# Altium PCB OSPLC2_2_CPU.PcbDoc
Units mm, origin at the board's own origin, x right, y up, seen from the top; angles counter-clockwise.
Board outline 110 x 42 mm, 2 copper layers (Top Layer, Bottom Layer); 72 components, 101 nets, 383 pads, 70 vias.
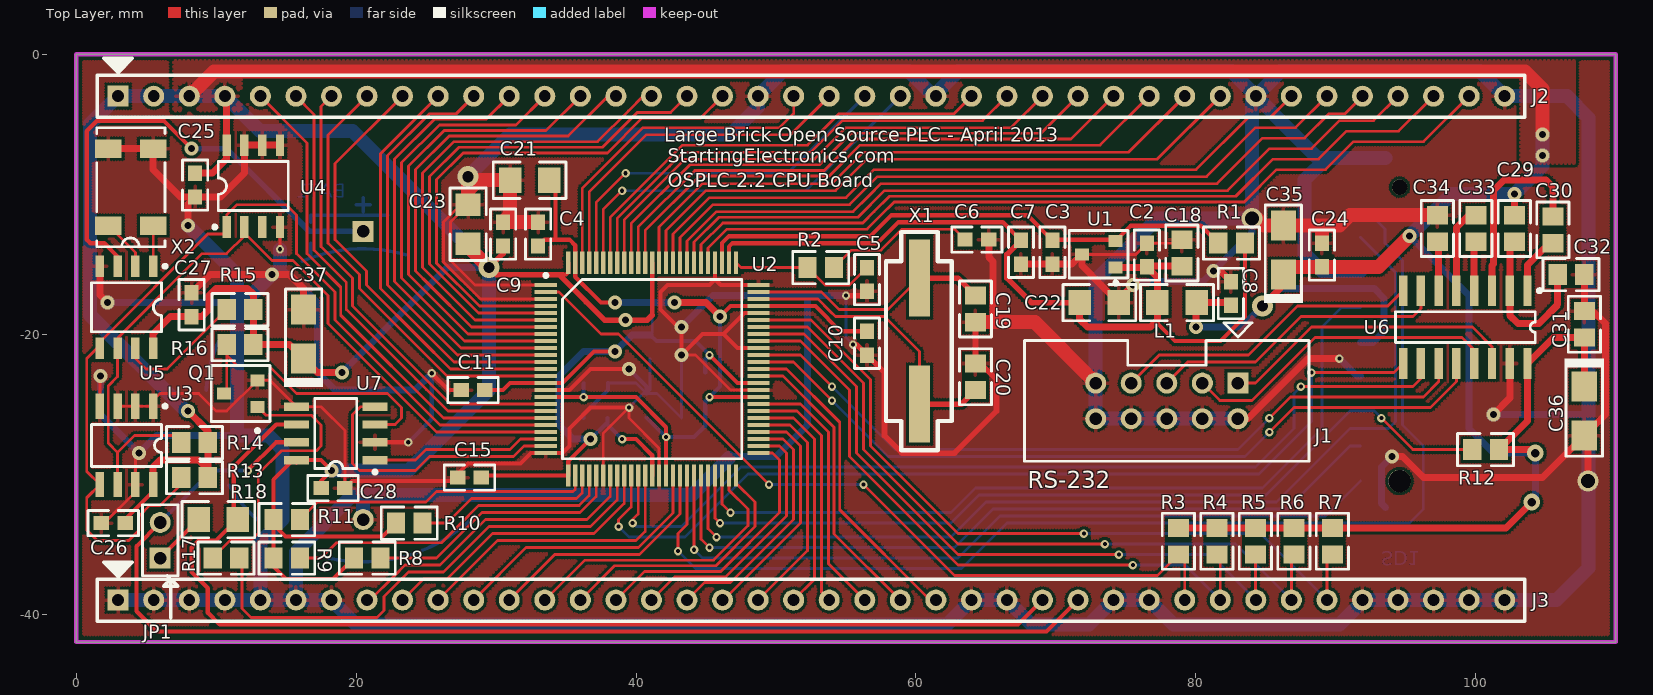
[diagram p0: Top Layer view]
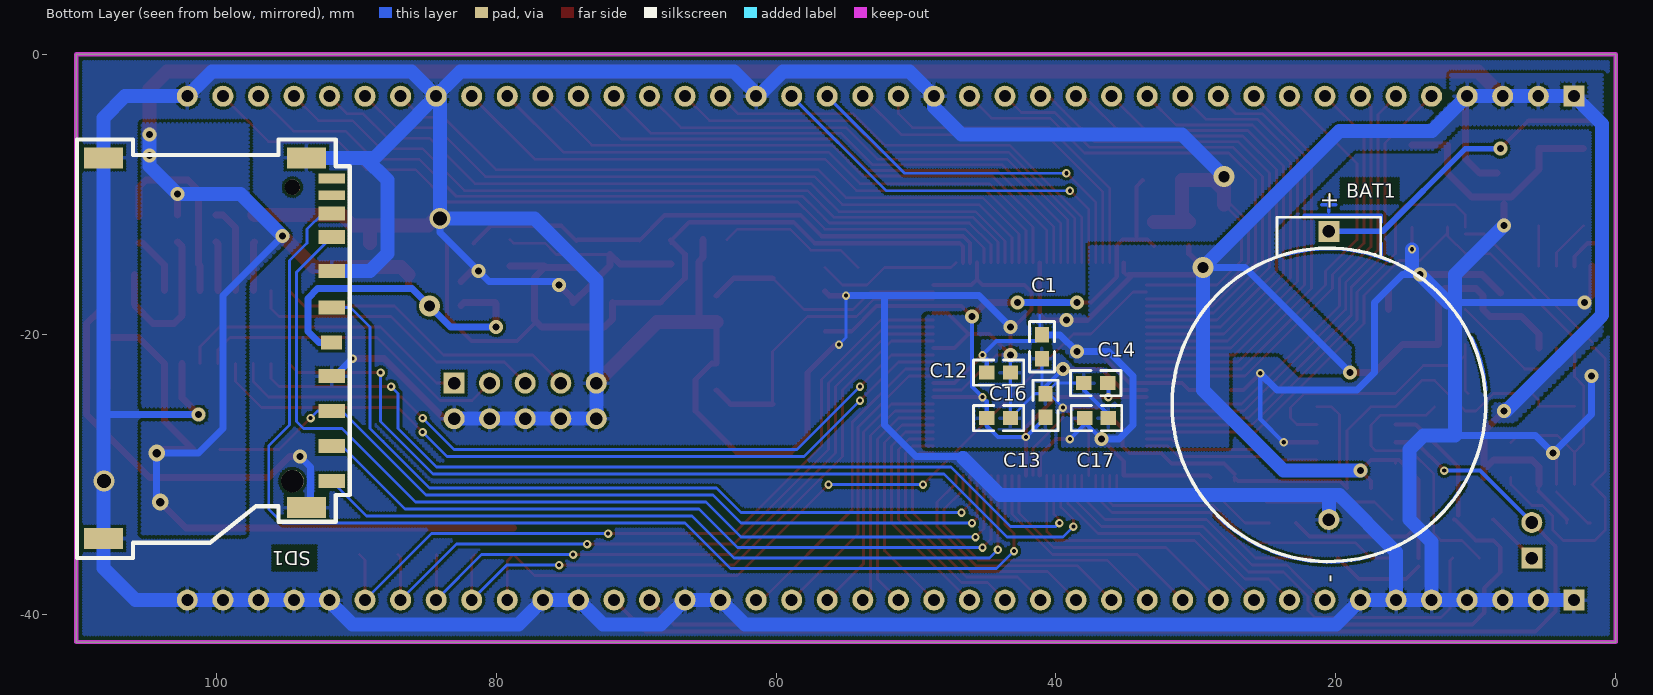
[diagram p1: Bottom Layer view, seen from below]

## Layer stack, top to bottom
Top Layer: signal copper 0.0356
Dielectric: dielectric 0.32, FR-4, Dk 4.8
Bottom Layer: signal copper 0.0356

## Board outline
0,-42 110,-42 110,0 0,0

## Design rules (kind name [scope] priority, off if disabled: settings)
Clearance [All] p1: gap=0.2
ComponentClearance [All] p1: gap=0.254 collisioncheckmode=0
HoleSize [All] p1: absolutevalues=TRUE maxlimit=5 minlimit=0.3 maxpercent=80.000 minpercent=20.000
PolygonConnect [All] p1: connectstyle=Relief reliefconductorwidth=0.254 reliefentries=4 polygonreliefangle="90 Angle"
RoutingLayers [All] p1: top layer=Horizontal bottom layer=Vertical
RoutingVias [All] p1: holewidth=0.3 width=0.6 viastyle="Through Hole" minholewidth=0.3 minwidth=0.6 maxholewidth=2 maxwidth=1
SolderMaskExpansion [All] p1: expansion=0.102
TestPointUsage [All] p1: valid=0 allowmultiple=FALSE
Testpoint [All] p1: side=15 testpointundercomponent=TRUE minsize=1.016 maxsize=2.54 preferedsize=1.524 minholesize=0 maxholesize=1.016 preferedholesize=0.813 testpointgrid=0.025 style=1023 order=-539222988
Width [All] p1: maxlimit=3 minlimit=0.2 preferedwidth=0.2 toplayer_prefwidth=0.5 minimp=50.000000 maximp=50.000000 favimp=50.000000
15 further rules are at their usual default settings.

## Classes and differential pairs
component class OSPLC2_2_CPU1: C1 C2 C3 C4 C5 C6 C7 C8 C9 C10 C11 C12 C13 C14 C15 C16 C17 C18 C19 C20 C21 C22 C23 L1 R1 R2 R3 R4 R5 R6 R7 R8 R9 R10 R11 U1 U2 X1
component class OSPLC2_2_CPU2: BAT1 C24 C25 C26 C27 C28 C29 C30 C31 C32 C33 C34 C35 C36 C37 J1 J2 J3 JP1 Q1 R12 R13 R14 R15 R16 R17 R18 SD1 U3 U4 U5 U6 U7 X2

## Components (designator, comment, footprint, x,y, rotation, side; value= is the part's Value field where it differs from the comment)
BAT1 "3V Battery" BATTERY_22MM 20.5,-33.25 r90 bottom
C1 "0603" 0603 41,-21.75 r90 bottom
C2 "0603" 0603 76.5,-13.5 r270 top
C3 "0603" 0603 69.75,-15 r90 top
C4 "0603" 0603 33,-12 r270 top
C5 "0603" 0603 56.5,-15.25 r270 top
C6 "0603" 0603 63.5,-13.25 r0 top
C7 "0603" 0603 67.5,-15 r90 top
C8 "0603" 0603 82.5,-16.25 r270 top
C9 "0603" 0603 30.5,-12 r270 top
C10 "0603" 0603 56.5,-21.5 r90 top
C11 "0603" 0603 27.5,-24 r0 top
C12 "0603" 0603 43.25,-22.75 r0 bottom
C13 "0603" 0603 43.25,-26 r0 bottom
C14 "0603" 0603 38,-23.5 r180 bottom
C15 "0603" 0603 27.25,-30.25 r0 top (schematic designator C16)
C16 "0603" 0603 40.75,-24.25 r270 bottom (schematic designator C17)
C17 "0603" 0603 36.25,-26 r0 bottom (schematic designator C18)
C18 "0805" 0805 79,-13.25 r270 top (schematic designator C19)
C19 "0805" 0805 64.25,-17.25 r270 top (schematic designator C20)
C20 "0805" 0805 64.25,-24 r90 top (schematic designator C21)
C21 "1206 X7R" 1206 31,-9 r0 top (schematic designator C22)
C22 "1206 X7R" 1206 74.5,-17.75 r180 top (schematic designator C23)
C23 "1206 X7R" 1206 28,-10.75 r270 top (schematic designator C24)
C24 "0603" 0603 89,-13.5 r270 top (schematic designator C25)
C25 "0603" 0603 8.5,-8.5 r270 top (schematic designator C26)
C26 "0603" 0603 3.5,-33.5 r180 top (schematic designator C27)
C27 "0603" 0603 8.25,-18.75 r90 top (schematic designator C28)
C28 "0603" 0603 17.5,-31 r0 top (schematic designator C29)
C29 "0805" 0805 102.75,-11.5 r270 top (schematic designator C30)
C30 "0805" 0805 105.5,-13.5 r90 top (schematic designator C31)
C31 "0805" 0805 107.75,-20.25 r90 top (schematic designator C32)
C32 "0805" 0805 107.75,-15.75 r180 top (schematic designator C33)
C33 "0805" 0805 100,-11.5 r270 top (schematic designator C34)
C34 "0805" 0805 97.25,-11.5 r270 top (schematic designator C35)
C35 "Tant_A" CAP_TANT_A 86.25,-14 r270 top (schematic designator C36)
C36 "Tant_A" CAP_TANT_A 107.75,-25.5 r90 top (schematic designator C37)
C37 "Tant_A" CAP_TANT_A 16.25,-20 r270 top (schematic designator C38)
J1 "IDC10M" IDC_10M_BOX 83,-23.5 r0 top (schematic designator J2)
J2 "HEADER 1 x 40" HEADER_1_40 3,-3 r0 top (schematic designator J1)
J3 "HEADER 1 x 40" HEADER_1_40 3,-39 r0 top
JP1 "JUMPER2" JUMPER2_254 6,-36 r90 top
L1 "100uH" 1206 77.25,-17.75 r0 top
Q1 "BC817-40" SO-G3/Y1 11.75,-24.25 r90 top (schematic designator Q2)
R1 "0805" 0805 83.5,-13.5 r180 top
R2 "0805" 0805 52.25,-15.25 r0 top
R3 "0805" 0805 78.75,-35.75 r90 top
R4 "0805" 0805 81.5,-35.75 r90 top
R5 "0805" 0805 84.25,-35.75 r90 top
R6 "0805" 0805 87,-35.75 r90 top
R7 "0805" 0805 89.75,-35.75 r90 top
R8 "0805" 0805 21.75,-36 r180 top
R9 "0805" 0805 16,-36 r180 top
R10 "0805" 0805 24.75,-33.5 r180 top
R11 "0805" 0805 16,-33.25 r180 top
R12 "0805" 0805 99.75,-28.25 r0 top (schematic designator R15)
R13 "0805" 0805 7.5,-30.25 r0 top (schematic designator R16)
R14 "0805" 0805 7.5,-27.75 r0 top (schematic designator R17)
R15 "0805" 0805 10.75,-18.25 r0 top (schematic designator R19)
R16 "0805" 0805 10.75,-20.75 r0 top (schematic designator R20)
R17 "0805" 0805 9.75,-36 r0 top (schematic designator R21)
R18 "1206" 1206 8.75,-33.25 r0 top (schematic designator R24)
SD1 "SD Card Connector" SD_CARD_GS09003P 91.75,-28 r270 bottom
U1 "REF2930" SOT23-3 74.25,-15.25 r180 top
U2 "AT91SAM7A3" F-QFP14x14-G100/X.3N 48.75,-16.5 r270 top
U3 "24LC64-I/SN" SO-G8/Z7.4 5.5,-30.75 r180 top
U4 "LM75AD" SO-G8/X.6 10.75,-6.5 r0 top
U5 "M41T00" SO-G8/X.6 5.5,-21 r180 top
U6 "MAX3232EI" SO-G16 99.25,-19.5 r180 top
U7 "ST3485EC" SO-G8/Z7.4 15.75,-29 r90 top
X1 "18.432MHz" CRYSTAL_SMT 60.25,-16 r270 top
X2 "32.768kHz" SCM200S_SMT 5.5,-12.25 r180 top

## Footprints (in the part's own frame and the unit in brackets; to place one, negate y for a bottom-side part, rotate by r counter-clockwise, add the part's x,y. Pads: shape width x height; smd on the part's side, far side on the other; paste and mask are expansions set on the pad)
0603 [mm]
  rect 1.1x1 smd: 1(0,0) 2(1.7,0)
  silkscreen extent -0.95,-0.9 2.65,0.9
0805 [mm]
  rect 1.3x1.5 smd: 1(0,0) 2(1.9,0)
  silkscreen extent -1.05,-1.15 2.95,1.15
1206 [mm]
  rect 1.6x1.8 smd: 1(0,0) 2(2.8,0)
  silkscreen extent -1.2,-1.3 4,1.3
BATTERY_22MM [mm] "Button battery, 22mm diameter"
  rect 1.5x1.5 hole 0.9: 1(20.6,0)
  round 1.5 hole 0.9: 2(0,0)
  silkscreen extent -3,-11.2 21.6,11.2
CAP_TANT_A [mm]
  rect 2.15x1.8 smd: 1(1.75,0) 2(-1.75,0)
  silkscreen extent -3.22,-1.4 3.77,1.4
CRYSTAL_SMT [mm] "Surface Mount Crystal"
  rect 5.5x1.5 smd: 1(0,0) 2(9,0)
  silkscreen extent -3.3,-2.4 12.3,2.3
F-QFP14x14-G100/X.3N [mm] "100-lead Quad Flat Pack"
  rect 0.3x1.6 smd: 1(0,-15.2) 2(0.5,-15.2) 3(1,-15.2) 4(1.5,-15.2) 5(2,-15.2) 6(2.5,-15.2) 7(3,-15.2) 8(3.5,-15.2) 9(4,-15.2) 10(4.5,-15.2) 11(5,-15.2) 12(5.5,-15.2) 13(6,-15.2) 14(6.5,-15.2) 15(7,-15.2) 16(7.5,-15.2) 17(8,-15.2) 18(8.5,-15.2) 19(9,-15.2) 20(9.5,-15.2) 21(10,-15.2) 22(10.5,-15.2) 23(11,-15.2) 24(11.5,-15.2) 25(12,-15.2) 51(12,0) 52(11.5,0) 53(11,0) 54(10.5,0) 55(10,0) 56(9.5,0) 57(9,0) 58(8.5,0) 59(8,0) 60(7.5,0) 61(7,0) 62(6.5,0) 63(6,0) 64(5.5,0) 65(5,0) 66(4.5,0) 67(4,0) 68(3.5,0) 69(3,0) 70(2.5,0) 71(2,0) 72(1.5,0) 73(1,0) 74(0.5,0) 75(0,0)
  rect 1.6x0.3 smd: 26(13.6,-13.6) 27(13.6,-13.1) 28(13.6,-12.6) 29(13.6,-12.1) 30(13.6,-11.6) 31(13.6,-11.1) 32(13.6,-10.6) 33(13.6,-10.1) 34(13.6,-9.6) 35(13.6,-9.1) 36(13.6,-8.6) 37(13.6,-8.1) 38(13.6,-7.6) 39(13.6,-7.1) 40(13.6,-6.6) 41(13.6,-6.1) 42(13.6,-5.6) 43(13.6,-5.1) 44(13.6,-4.6) 45(13.6,-4.1) 46(13.6,-3.6) 47(13.6,-3.1) 48(13.6,-2.6) 49(13.6,-2.1) 50(13.6,-1.6) 76(-1.6,-1.6) 77(-1.6,-2.1) 78(-1.6,-2.6) 79(-1.6,-3.1) 80(-1.6,-3.6) 81(-1.6,-4.1) 82(-1.6,-4.6) 83(-1.6,-5.1) 84(-1.6,-5.6) 85(-1.6,-6.1) 86(-1.6,-6.6) 87(-1.6,-7.1) 88(-1.6,-7.6) 89(-1.6,-8.1) 90(-1.6,-8.6) 91(-1.6,-9.1) 92(-1.6,-9.6) 93(-1.6,-10.1) 94(-1.6,-10.6) 95(-1.6,-11.1) 96(-1.6,-11.6) 97(-1.6,-12.1) 98(-1.6,-12.6) 99(-1.6,-13.1) 100(-1.6,-13.6)
  silkscreen extent -0.82,-15.32 12.4,-1.2
HEADER_1_40 [mm] "2.54mm HEADER 1 x 40"
  rect 1.5x1.5 hole 0.85: 1(0,0)
  round 1.5 hole 0.85: 2(2.54,0) 3(5.08,0) 4(7.62,0) 5(10.16,0) 6(12.7,0) 7(15.24,0) 8(17.78,0) 9(20.32,0) 10(22.86,0) 11(25.4,0) 12(27.94,0) 13(30.48,0) 14(33.02,0) 15(35.56,0) 16(38.1,0) 17(40.64,0) 18(43.18,0) 19(45.72,0) 20(48.26,0) 21(50.8,0) 22(53.34,0) 23(55.88,0) 24(58.42,0) 25(60.96,0) 26(63.5,0) 27(66.04,0) 28(68.58,0) 29(71.12,0) 30(73.66,0) 31(76.2,0) 32(78.74,0) 33(81.28,0) 34(83.82,0) 35(86.36,0) 36(88.9,0) 37(91.44,0) 38(93.98,0) 39(96.52,0) 40(99.06,0)
  silkscreen extent -1.5,-1.5 100.5,2.7
IDC_10M_BOX [mm]
  rect 1.5x1.5 hole 0.9: 1(0,0)
  round 1.5 hole 0.9: 2(0,-2.54) 3(-2.54,0) 4(-2.54,-2.54) 5(-5.08,0) 6(-5.08,-2.54) 7(-7.62,0) 8(-7.62,-2.54) 9(-10.16,0) 10(-10.16,-2.54)
  silkscreen extent -15.24,-5.59 5.08,4.32
JUMPER2_254 [mm]
  rect 1.5x1.5 hole 0.9: 1(0,0)
  round 1.5 hole 0.9: 2(2.54,0)
  silkscreen extent -1.27,-1.27 3.81,1.27
SCM200S_SMT [mm] "SCM200S SMT Crystal"
  rect 1.9x1.3 smd: 1(0,0) 2(0,-5.5) 3(3.2,-5.5) 4(3.2,0)
  silkscreen extent -0.83,-7 4.03,1.5
SD_CARD_GS09003P [mm] "Amphenol SD Card Connector, GSD09003P"
  round 1.1 hole 1.1 unplated: 0(-18.5,-2.8)
  round 1.6 hole 1.6 unplated: 0(2.5,-2.8)
  rect 1x1.9 smd: 1(0,0) 2(-2.5,0) 3(-5,0) 5(-9.9,0) 6(-12.5,0) 7(-14.925,0) 8(-16.625,0) 9(2.5,0)
  rect 1x1.5 smd: 4(-7.4,0)
  rect 0.7x1.9 smd: 10(-17.925,0) 11(-19.125,0)
  rect 1.5x2.8 smd: 12(-20.6,-1.8) 13(4.4,-1.8) 14(6.6,-16.3) 15(-20.6,-16.3)
  silkscreen extent -21.9,-18.2 8,1.3
SO-G3/Y1 [mm]
  rect 0.85x1 smd: 1(-0.95,-1.2) 2(0.95,-1.2) 3(0,1.2)
  silkscreen extent -2.77,-2.1 2,2.1
SO-G8/X.6 [mm]
  rect 0.6x1.55 smd: 1(0,-5.85) 2(1.27,-5.85) 3(2.54,-5.85) 4(3.81,-5.85) 5(3.81,0) 6(2.54,0) 7(1.27,0) 8(0,0)
  silkscreen extent -0.97,-5.97 4.4,-1.18
SO-G8/Z7.4 [mm]
  rect 0.6x1.8 smd: 1(0,-5.6) 2(1.27,-5.6) 3(2.54,-5.6) 4(3.81,-5.6) 5(3.81,0) 6(2.54,0) 7(1.27,0) 8(0,0)
  silkscreen extent -0.98,-5.72 4.41,-1.3
SO-G16 [mm]
  rect 0.6x2.2 smd: 1(-4.445,-2.6) 2(-3.175,-2.6) 3(-1.905,-2.6) 4(-0.635,-2.6) 5(0.635,-2.6) 6(1.905,-2.6) 7(3.175,-2.6) 8(4.445,-2.6) 9(4.445,2.6) 10(3.175,2.6) 11(1.905,2.6) 12(0.635,2.6) 13(-0.635,2.6) 14(-1.905,2.6) 15(-3.175,2.6) 16(-4.445,2.6)
  silkscreen extent -5.42,-2.72 5,1.1
SOT23-3 [mm] "3 PIN SOT23 PACKAGE"
  rect 1x0.85 smd: 1(0,0) 2(0,-1.9) 3(2.4,-0.95)
  silkscreen extent -0.9,-2.65 3.3,1.22

## Part data
BAT1: library part BATTERY_22MM, "3 Volt Lithium Button Battery"
C1 C2 C3 C4 C5 C6 C7 C8 C9 C10 C11 C12 C13 C14 C15 C16 C17 C24 C25 C26 C27 C28: library part CAP_0603, "0603 footprint non-polorised capacitor"
C18 C19 C20 C29 C30 C31 C32 C33 C34: library part CAP_0805, "0805 footprint non-polarised capacitor"
C21 C22 C23: library part CAP_1206, "1206 footprint non-polorised capacitor"
C35 C36 C37: library part CAP_TANT_A, "Tantalum Capacitor, A Package"
J1: library part IDC_10M, "10 pin IDC male connector, vertical, box"
J2 J3: library part HEADER_1_40, "2.54mm header, 1 by 40"
JP1: "2 Pin Jumper, 2.54mm"
L1: library part INDUCTOR_1206, "muRata Chip Coil"
Q1: "NPN General Purpose Amplifier"
R1 R2 R3 R4 R5 R6 R7 R8 R9 R10 R11 R12 R13 R14 R15 R16 R17: library part RES_0805, "0805 footprint resistor"
R18: library part RES_1206, "1206 footprint resistor"
SD1: library part SD_CARD_GSD09003P, "Secure Digital Card Connector, Amphenol, GSD09003P"
U1: "3V LDO Voltage Reference"
U2: "Atmel AT91 ARM Microcontroller with CAN ports"
U3: "Microchip 64k bit I2C bus serial EEPROM"
U4: "Phillips Digital temperature sensor and thermal Watchdog"
U5: "ST Serial Access Timekeeper"
U6: library part MAX3232ESE, "3.0V TO 5.5V, Low-Power, up to 1Mbps, True RS-232 Transceiver Using Four 0.1µF External Capacitor"
U7: "ST 3.3v RS-485/RS-422 Transceiver"
X1: library part CRYSTAL_SMT, "SMT crystal"
X2: library part SCM200S, "SMT 32.768kHz Crystal"

## Via types
v1: diameter 0.6, hole 0.3, Top Layer to Bottom Layer, 36 vias
v2: diameter 1, hole 0.5, Top Layer to Bottom Layer, 27 vias
v3: diameter 1.5, hole 0.8, Top Layer to Bottom Layer, 3 vias
v4: diameter 1.5, hole 1, Top Layer to Bottom Layer, 2 vias
v5: diameter 1.2, hole 0.6, Top Layer to Bottom Layer, 2 vias

## Nets (pads, with @x,y where several pads share a name; then routed paths per layer and width w, separated by ;. In a path a pad name is that pad's centre, name@x,y a point inside that pad or via, vN(x,y) a via of type N, cw(c..) or ccw(c..) an arc to the next point about the centre after c; other vN are vias at no path point)
AD1: J2.39 U2.80 | length 59.9
  Top Layer w0.2: U2.80 45.15,-13.85 46.5,-12.5 56.5,-12.5 57.437,-11.563 58.45,-10.55 83.45,-10.55 85.75,-8.25 89.25,-8.25 91.25,-6.25 96.27,-6.25 J2.39
AD2: J2.38 U2.81 | length 58
  Top Layer w0.2: U2.81 44.65,-13.6 46.2,-12.05 56.2,-12.05 57,-11.25 58.1,-10.15 82.85,-10.15 85.5,-7.5 88.75,-7.5 90.75,-5.5 94.48,-5.5 J2.38
AD3: J2.37 U2.82 | length 56.1
  Top Layer w0.2: U2.82 44.15,-13.416 45.916,-11.65 55.85,-11.65 57.75,-9.75 82.25,-9.75 85.25,-6.75 88.25,-6.75 90.25,-4.75 92.69,-4.75 J2.37
AD4: J2.36 U2.83 | length 54.1
  Top Layer w0.2: U2.83 43.65,-13.35 45.75,-11.25 55.5,-11.25 56.639,-10.111 57.5,-9.25 81.5,-9.25 84.75,-6 87.75,-6 89.5,-4.25 90.65,-4.25 J2.36
AD5: J2.35 U2.84 | length 52.2
  Top Layer w0.2: U2.84 43.15,-13.1 45.5,-10.75 55.25,-10.75 57.25,-8.75 80.75,-8.75 84.25,-5.25 87.11,-5.25 J2.35
AD6: J2.34 U2.85 | length 50.3
  Top Layer w0.2: U2.85 42.65,-12.85 45.25,-10.25 55,-10.25 57,-8.25 80,-8.25 83.75,-4.5 85.32,-4.5 J2.34
ADC3V3: C2.2 C7.2 C18.2 C22.2 L1.1 R1.1 U1.1 U2.77 | length 62.6
  Top Layer w0.2: C7.2@67.45,-13.3 C7.2 C7.2@67.5,-13.55 ; C22.2@71.7,-17.95 C22.2 ; L1.1@77.25,-18.5 L1.1
  Top Layer w0.3: U2.77 46.65,-13.75 46.9,-13.5 57.25,-13.5 58.75,-12 66.2,-12 C7.2 ; 77.25,-19 77.25,-19.25 78.5,-20.5 81.75,-20.5 83.5,-18.75 R1.1
  Top Layer w0.4: C7.2 66.5,-14.3 66.5,-16 68.25,-17.75 C22.2
  Top Layer w0.5: C22.2 71.7,-18.95 72.25,-19.5 76.75,-19.5 77.25,-19 77.25,-15.95 C2.2 ; U1.1 76.45,-15.25 76.55,-15.15 C18.2
DDM: J2.21 U2.97 | length 25
  Top Layer w0.2: U2.97 36.65,-9.85 40.75,-5.75 51.05,-5.75 J2.21
DDP: J2.20 U2.98 | length 23.9
  Top Layer w0.2: U2.98 36.15,-9.6 40.5,-5.25 50.25,-5.25 51.26,-4.24 J2.20
DRXD: U2.64 U6.12 | length 56.2
  Top Layer w0.2: U2.64 51.25,-22 v1(54,-24.75) ; v1(85.25,-27) 85.75,-26.5 87,-25.25 96.75,-25.25 98.615,-23.385 U6.12
  Bottom Layer w0.2: v1(54,-24.75) 58,-28.75 83.5,-28.75 v1(85.25,-27)
DTXD: U2.65 U6.11 | length 54.7
  Top Layer w0.2: U2.65 51.75,-21.5 v1(54,-23.75) ; v1(85.25,-26) 86.75,-24.5 96.25,-24.5 97.345,-23.405 U6.11
  Bottom Layer w0.2: v1(54,-23.75) 58.5,-28.25 83,-28.25 v1(85.25,-26)
GND: BAT1.2 C1.1 C2.1 C3.1 C4.1 C5.2 C6.2 C7.1 C8.1 C9.1 C10.1 C11.1 C12.1 C13.1 C14.1 C15.1 C16.1 C17.1 C18.1 C19.2 C20.2 C21.1 C22.1 C23.1 C24.1 C25.2 C26.2 C27.2 C28.2 C31.2 C32.1 C34.1 C35.2 C36.2 C37.2 J1.2 J1.4 J1.6 J1.8 J1.9 J1.10 J2.19 J2.24 J2.33 J2.40 J3.1 J3.2 J3.3 J3.4 J3.5 J3.6 J3.7 J3.25 J3.26 J3.29 J3.30 J3.36 J3.37 J3.38 J3.39 J3.40 Q1.2 SD1.3 SD1.6 SD1.12 SD1.13 SD1.14 SD1.15 U1.3 U2.1 U2.3 U2.16 U2.25 U2.31 U2.39 U2.60 U2.66 U2.71 U2.75 U2.79 U3.1 U3.2 U3.3 U3.4 U3.7 U4.4 U4.5 U4.6 U4.7 U5.4 U6.15 U7.2 U7.5 X2.2 X2.3 | length 797.6
  Top Layer w0.2: U3.4 1.69,-23.06 v2(1.75,-23) ; C26.2 2,-33.5 U3.7@4.23,-31.27 ; U3.3 U3.2 U3.1 5.5,-24.75 6,-24.25 8.75,-24.25 10,-25.5 10.75,-25.5 Q1.2 13.86,-23.3 U7.5 17.5,-25.19 19.2,-26.89 C28.2 ; U3.7 4.23,-28.77 v2(4.5,-28.5) ; v1(14.56,-13.94) U4.4 ; C15.1@27.25,-30.5 C15.1 ; U2.3 28.881,-17.5 26.25,-14.869 26.25,-12 27.5,-10.75 C23.1 26.75,-12 26.75,-14.75 28.5,-16.5 U2.1 ; U2.31 37.65,-27.1 v1(39.5,-25.25) 39.5,-26 41.65,-28.15 U2.39 ; v2(43.25,-21.5) 44.25,-21.5 46.75,-24 U2.60 ; U1.3 75.7,-14.3 C2.1 78.75,-13.5 C18.1
  Top Layer w0.3: C28.2 19.7,-30.5 27,-30.5 C15.1 ; U7.2 v1(23.73,-27.73) ; v1(25.4,-22.8) 26.6,-24 C11.1 ; C15.1@27.25,-30 28,-29.25 31.75,-29.25 32.5,-28.5 34.75,-28.5 35.25,-28 35.25,-26.75 36.75,-25.25 v1(39.5,-25.25) ; U2.16 35.25,-24 36.75,-22.5 v2(39.5,-22.5) ; U2.79 45.65,-16.1 ; U2.66 47.25,-21 46.25,-20 ; U2.71 47.75,-18.5 46.25,-20 ; U2.75 46.05,-16.5 45.65,-16.1 ; 45.65,-16.1 45.25,-16.5 42.25,-16.5 41.75,-17 41.75,-18.25 43,-19.5 v2(43.25,-19.5) v2(43.25,-21.5) 44.75,-20 46.25,-20
  Top Layer w0.4: v1(55,-17.25) 56.2,-17.25 C5.2 ; v1(55.5,-20.75) 55.75,-20.75 57.75,-22.75 57.75,-27.25 59,-28.5 62.75,-28.5 65.75,-25.5 65.75,-23.25 64.6,-22.1 C20.2 C19.2
  Top Layer w0.5: U5.4 1.69,-17.19 v2(2.25,-17.75) ; X2.3 X2.2 5.5,-8.25 7.45,-10.2 10.3,-10.2 12.02,-8.48 U4.7 U4.5 ; v2(8,-12.25) 8,-10.7 ; C27.2 9.55,-15.75 15.25,-15.75 16.25,-16.75 C37.2 ; C6.2 65.2,-14.5 65.5,-14.8 65.5,-19.15 ; C7.1 71.15,-15 U1.3 71.85,-15.1 73.338,-16.588 C22.1 74.5,-17.5 v2(75.5,-16.5) v2@75.75,-16.25 ; v2(81.25,-15.5) 81.75,-15.5 C8.1 ; J1.2 83.71,-26.04 86.291,-23.459 ; 85.75,-24 86.291,-23.459 ; v1(90.25,-21.75) 88,-21.75 86.291,-23.459 ; v2(94,-28.75) 94.75,-28.75 96.25,-30.25 104.75,-30.25 109.25,-25.75 109.25,-19.25 108.35,-18.35 C31.2 C32.1 ; v2(101.25,-25.75) 102.425,-24.575 U6.15 ; C36.2 108,-27.5 v4(108,-30.5)
  Top Layer w1: C23.1 v3(28,-8.75) ; 28,-9.75 28.75,-9 C21.1 31,-11.5 C9.1 C4.1 ; C19.2 68.49,-19.15 J1.9 ; v4(84,-11.75) 84.35,-11.75 84.85,-12.25 90.25,-12.25 91,-11.5 C34.1 ; C24.1 89,-12.25
  Bottom Layer w0.2: C14.1 40,-23.5 C16.1 41,-24 C1.1 ; v1(39.5,-25.25) 40.5,-24.25 41.5,-24.25 C13.1 C12.1 v2(43.25,-21.5) ; v1(55,-17.25) 55,-20.25 v1(55.5,-20.75)
  Bottom Layer w0.3: 14.56,-15.06 15.25,-15.75 ; v1(23.73,-27.73) 25.4,-26.06 v1(25.4,-22.8) ; C17.1 36.25,-25.75 38,-24 C14.1 ; v2(39.5,-22.5) 40.75,-23.75 C16.1
  Bottom Layer w0.5: v2(1.75,-23) 1.75,-25.75 v2(4.5,-28.5) 5.75,-27.25 11.5,-27.25 ; v2(2.25,-17.75) 12,-17.75 ; v2(14,-15.75) 15.25,-15.75 17.25,-17.75 17.25,-22.75 18.5,-24 24.2,-24 v1(25.4,-22.8) ; v2(43.25,-19.5) 45.5,-17.25 v1(55,-17.25) ; 46.65,-28.85 46.75,-28.75 50,-28.75 52.25,-26.5 52.25,-17.25 ; v2(75.5,-16.5) 75.75,-16.25 80.5,-16.25 84,-12.75 v4@84,-11.5 ; v1(90.25,-21.75) 91.5,-23 SD1.3 ; SD1.13 93.25,-32.1 93.25,-29.5 v2(94,-28.75) ; v2(101.25,-25.75) 108.05,-25.75
  Bottom Layer w1: J3.1 J3.7 19.99,-40.75 62.21,-40.75 J3.25 J3.26 68.25,-40.75 72.37,-40.75 J3.29 J3.30 78.41,-40.75 90.25,-40.75 92,-39 94.5,-39 J3.38 J3.39 J3.40 105.75,-39 108.05,-36.7 SD1.15 108.05,-4.55 106.5,-3 J2.40 100.31,-1.25 86.03,-1.25 J2.33 ; v2(8,-12.25) 11.5,-15.75 11.5,-27.25 13.75,-27.25 14.75,-28.25 14.75,-33.25 13.16,-34.84 J3.5 ; 12,-17.75 v2(14,-15.75) ; 14.56,-15.06 v1(14.56,-13.94) ; J3.6 15.7,-35.55 19.75,-31.5 44,-31.5 46.65,-28.85 ; BAT1.2 20.5,-31.5 ; v3(28,-8.75) 31,-5.75 46.75,-5.75 48.72,-3.78 J2.19 50.47,-1.25 59.5,-1.25 J2.24@61.25,-3 ; J2.24@61.335,-2.915 63,-1.25 82.53,-1.25 88.68,-7.4 SD1.12 ; J1.2 J1.4 J1.6 J1.8 J1.10 72.84,-16.16 77.25,-11.75 v4(84,-11.75) J2.33@84,-3.28 ; 89.35,-7.4 87.75,-9 87.75,-14.25 89,-15.5 SD1.6
I1: J2.5 U2.20 | length 35.7
  Top Layer w0.2: J2.5 16.5,-6.34 16.5,-14.25 18.9,-16.65 18.9,-18.65 26.25,-26 U2.20
I2: J2.6 U2.19 | length 39.4
  Top Layer w0.2: J2.6 17,-4.3 17,-14 19.3,-16.3 19.3,-18.234 26.566,-25.5 ; 24.283,-23.217 26.566,-25.5 ; 25.033,-23.967 26.566,-25.5 ; U2.19 26.566,-25.5
I3: J2.7 U2.18 | length 32.9
  Top Layer w0.2: J2.7 17.5,-3.74 17.5,-13.75 19.75,-16 19.75,-18 26.5,-24.75 26.75,-25 U2.18
I4: J2.8 U2.14 | length 31.7
  Top Layer w0.2: J2.8 18,-5.78 18,-13.5 20.25,-15.75 20.25,-16.75 26.5,-23 U2.14
I5: J2.9 U2.13 | length 33.1
  Top Layer w0.2: 21.25,-17 24.475,-20.225 26.75,-22.5 U2.13 ; 22.25,-18 20.75,-16.5 20.75,-15.5 18.5,-13.25 18.5,-7.82 J2.9
I6: J2.10 U2.12 | length 29.4
  Top Layer w0.2: J2.10 21.75,-7.11 21.75,-16.75 24.75,-19.75 27,-22 U2.12
I7: J2.11 U2.11 | length 30.5
  Top Layer w0.2: J2.11 27.15,-4.25 25.25,-4.25 22.25,-7.25 22.25,-16.5 27.25,-21.5 U2.11
I8: J2.12 U2.10 | length 31.6
  Top Layer w0.2: J2.12 29.29,-4.65 25.6,-4.65 22.75,-7.5 22.75,-16.25 27.5,-21 U2.10
I9: J2.13 U2.9 | length 32.6
  Top Layer w0.2: J2.13 31.43,-5.05 25.95,-5.05 23.25,-7.75 23.25,-16 27.75,-20.5 U2.9
I10: J2.14 U2.8 | length 33.7
  Top Layer w0.2: U2.8 28,-20 23.75,-15.75 23.75,-8 26.3,-5.45 33.57,-5.45 J2.14
I11: J2.15 U2.7 | length 34.7
  Top Layer w0.2: U2.7 28.25,-19.5 25.26,-16.51 24.25,-15.5 24.25,-8.25 26.65,-5.85 35.15,-5.85 38,-3 J2.15
I12: J2.16 U2.6 | length 35.7
  Top Layer w0.2: U2.6 28.5,-19 25.75,-16.25 24.75,-15.25 24.75,-8.5 27,-6.25 37.25,-6.25 39.449,-4.051 40.5,-3 J2.16
I13: J2.17 U2.5 | length 36.8
  Top Layer w0.2: U2.5 28.75,-18.5 25.25,-15 25.25,-8.75 27.35,-6.65 37.6,-6.65 40.083,-4.167 42.473,-4.167 J2.17
I14: J2.18 U2.4 | length 37.9
  Top Layer w0.2: U2.4 28.816,-18 25.75,-14.934 25.75,-8.95 27.65,-7.05 37.95,-7.05 40.43,-4.57 44.61,-4.57 J2.18
I15: J2.25 U2.94 | length 32.6
  Top Layer w0.2: U2.94 38.15,-11.666 42.291,-7.525 43.316,-6.5 52.25,-6.5 54.5,-4.25 62.71,-4.25 J2.25
I16: J2.26 U2.93 | length 34.6
  Top Layer w0.2: U2.93 38.65,-11.731 42.381,-8 43.381,-7 52.5,-7 54.75,-4.75 64.75,-4.75 J2.26
I17: J2.27 U2.92 | length 36.6
  Top Layer w0.2: U2.92 39.15,-11.85 43.5,-7.5 52.75,-7.5 55,-5.25 66.79,-5.25 J2.27
I18: J2.28 U2.91 | length 38.5
  Top Layer w0.2: U2.91 39.65,-12.1 43.85,-7.9 53.1,-7.9 55.35,-5.65 68.93,-5.65 J2.28
I19: J2.29 U2.90 | length 40.4
  Top Layer w0.2: U2.90 40.15,-12.35 44.2,-8.3 53.45,-8.3 55.7,-6.05 71.07,-6.05 J2.29
I20: J2.30 U2.89 | length 42.3
  Top Layer w0.2: U2.89 40.65,-12.6 44.55,-8.7 53.8,-8.7 56,-6.5 73.16,-6.5 J2.30
I21: J2.31 U2.87 | length 44
  Top Layer w0.2: U2.87 41.65,-12.35 44.75,-9.25 54,-9.25 56.25,-7 75.2,-7 J2.31
I22: J2.32 U2.86 | length 45.9
  Top Layer w0.2: U2.86 42.15,-12.6 45,-9.75 54.25,-9.75 56.5,-7.5 77.24,-7.5 J2.32
LED1: J3.8 U2.32 | length 22
  Top Layer w0.2: J3.8@20.78,-38.97 J3.8 21,-39 22.728,-37.272 23.5,-36.5 26,-36.5 29.25,-33.25 36.5,-33.25 38.15,-31.6 U2.32
NetBAT1_1: BAT1.1 U5.3 | length 34.5
  Top Layer w0.3: U5.3 2.96,-14.46 2,-13.5 1,-13.5 0.75,-13.25 0.75,-5.5 1.5,-4.75 6.25,-4.75 v2(8.25,-6.75)
  Bottom Layer w0.4: v2(8.25,-6.75) 10.75,-6.75 16.65,-12.65 BAT1.1
NetC3_2: C3.2 R1.2 U1.2 U2.78 | length 39.5
  Top Layer w0.3: U2.78 46.15,-13.486 46.636,-13 56.75,-13 58.25,-11.5 67.95,-11.5 C3.2 69.8,-13.25 74.15,-13.25 U1.2 75.35,-12.25 80.35,-12.25 R1.2
NetC5_1: C5.1 R2.1 U2.76 | length 10.5
  Top Layer w0.2: U2.76 47.5,-15.25 R2.1 53.5,-16.5 55.25,-16.5 C5.1
NetC6_1: C6.1 R2.2 | length 10.8
  Top Layer w0.2: R2.2 55.4,-14 57.5,-14 59,-12.5 62.75,-12.5 C6.1
NetC19_1: C19.1 U2.74 X1.1 | length 17.5
  Top Layer w0.2: U2.74 53.25,-17 54.5,-18.25 58,-18.25 X1.1
  Top Layer w0.4: X1.1 63,-16 C19.1
NetC20_1: C20.1 U2.73 X1.2 | length 21.2
  Top Layer w0.2: U2.73 53,-17.5 53.868,-18.368 54.25,-18.75 57.75,-18.75 58.5,-19.5 60.25,-21.25 X1.2
  Top Layer w0.4: X1.2 63.25,-25 C20.1
NetC29_2: C29.2 C32.2 U6.2 | length 11.8
  Top Layer w0.5: C29.2 102.425,-13.725 102.425,-18.675 103,-19.25 104.5,-19.25 105.85,-17.9 C32.2
NetC30_1: C30.1 U6.1 | length 4.3
  Top Layer w0.5: U6.1 103.695,-15.055 105.25,-13.5 C30.1
NetC30_2: C30.2 U6.3 | length 14.1
  Top Layer w0.5: U6.3 101.155,-15.095 101.25,-15 101.25,-9.75 102,-9 105,-9 105.5,-9.5 C30.2
NetC33_1: C33.1 U6.5 | length 6.3
  Top Layer w0.5: U6.5 98.615,-12.385 99.5,-11.5 C33.1
NetC33_2: C33.2 U6.4 | length 3.5
  Top Layer w0.5: U6.4 99.885,-13.515 C33.2
NetC34_2: C34.2 U6.6 | length 3.5
  Top Layer w0.5: C34.2 97.345,-13.495 U6.6
NetJ1_1: J1.1 U6.14 | length 21.6
  Top Layer w0.2: J1.1 84.25,-23.5 88.25,-19.5 99.75,-19.5 101.155,-20.905 U6.14
NetJ1_3: J1.3 U6.13 | length 23.1
  Top Layer w0.2: J1.3 81.71,-24.75 84,-24.75 88.5,-20.25 99,-20.25 99.885,-21.135 U6.13
NetJ1_5: J1.5 U6.7 | length 21.6
  Top Layer w0.2: J1.5 79.42,-22 84.25,-22 87.5,-18.75 95.5,-18.75 96.075,-18.175 U6.7
NetJ1_7: J1.7 U6.8 | length 22.2
  Top Layer w0.2: J1.7 77.38,-21.5 83.75,-21.5 87.25,-18 93.705,-18 U6.8
NetJP1_1: JP1.1 R18.1 | length 3.9
  Top Layer w0.3: JP1.1 R18.1
NetQ1_1: Q1.1 R17.1 | length 20.1
  Top Layer w0.2: R17.1 11,-34.75 12.5,-34.75 13,-34.25 13,-30 14.67,-28.33 17.17,-28.33 17.5,-28 17.5,-26.5 16.79,-25.79 13.54,-25.79 Q1.1
NetQ1_3: Q1.3 R16.1 U7.3 | length 20.5
  Top Layer w0.2: Q1.3 10.75,-24.05 R16.1 ; 10.75,-21.5 11.5,-22.25 13.75,-22.25 15.75,-24.25 22.25,-24.25 22.5,-24.5 23.25,-25.25 23.25,-26 22.79,-26.46 U7.3
NetR8_1: R8.1 U2.30 | length 18.7
  Top Layer w0.2: R8.1 25.75,-36 29,-32.75 36,-32.75 37.15,-31.6 U2.30
NetR9_1: R9.1 U2.29 | length 23.9
  Top Layer w0.2: R9.1 17.5,-36 18.593,-34.907 26.093,-34.907 27.37,-33.63 28.75,-32.25 35.934,-32.25 36.65,-31.534 U2.29
NetR10_1: R10.1 U2.28 | length 13.5
  Top Layer w0.2: R10.1 26.5,-33.5 28.25,-31.75 35.75,-31.75 36.15,-31.35 U2.28
NetR11_1: R11.1 U2.27 | length 21.5
  Top Layer w0.2: R11.1 17.25,-32 25,-32 25.75,-31.25 35.5,-31.25 35.65,-31.1 U2.27
NetR15_1: R15.1 U5.7 | length 9.3
  Top Layer w0.2: U5.7 4.23,-21.73 5,-22.5 6.5,-22.5 R15.1
NetU5_1: U5.1 X2.1 | length 2.9
  Top Layer w0.2: U5.1 X2.1
NetU5_2: U5.2 X2.4 | length 3.7
  Top Layer w0.2: X2.4 4.23,-14.18 U5.2
NRST: J3.31 R3.1 U2.2 | length 57.6
  Top Layer w0.2: U2.2 34.5,-17 37.5,-20 38.75,-20 40.096,-21.346 v1(49.5,-30.75) ; v1(56.25,-30.75) 62.75,-37.25 77.25,-37.25 R3.1 79.2,-36.2 J3.31
  Bottom Layer w0.2: v1(49.5,-30.75) v1(56.25,-30.75)
O1: J3.9 U2.34 | length 20.7
  Top Layer w0.2: J3.9 24.82,-37.5 26.5,-37.5 29.75,-34.25 37,-34.25 39.15,-32.1 U2.34
O2: J3.10 U2.37 | length 20.8
  Top Layer w0.2: J3.10 30.11,-34.75 40,-34.75 40.65,-34.1 U2.37
O3: J3.11 U2.41 | length 19.5
  Top Layer w0.2: J3.11 32.15,-35.25 40.184,-35.25 42.65,-32.784 U2.41
O4: J3.12 U2.42 | length 17.5
  Top Layer w0.2: J3.12 34.19,-35.75 40.25,-35.75 43.15,-32.85 U2.42
O5: J3.13 U2.49 | length 20.9
  Top Layer w0.2: J3.13 34.49,-37.99 ; 34.5,-38 36.35,-36.15 45.534,-36.15 48,-33.684 48,-32.5 46.65,-31.15 U2.49
O6: J3.14 U2.50 | length 18.9
  Top Layer w0.2: J3.14 38.47,-36.55 45.7,-36.55 48.5,-33.75 48.5,-32 47.15,-30.65 U2.50
O7: J3.15 U2.51 | length 19.7
  Top Layer w0.2: J3.15 40.61,-36.95 46.05,-36.95 50.25,-32.75 50.25,-29 49.75,-28.5 U2.51
O8: J3.16 U2.52 | length 18.8
  Top Layer w0.2: J3.16 42.75,-37.35 46.4,-37.35 50.75,-33 50.75,-28.5 50.25,-28 U2.52
O9: J3.17 U2.53 | length 17.8
  Top Layer w0.2: J3.17 44.89,-37.75 46.75,-37.75 51.25,-33.25 51.25,-28.25 50.5,-27.5 U2.53
O10: J3.18 U2.54 | length 16.8
  Top Layer w0.2: J3.18 46.25,-39 51.75,-33.5 51.75,-28 50.75,-27 U2.54
O11: J3.19 U2.55 | length 16.7
  Top Layer w0.2: J3.19 52.25,-35.47 52.25,-27.75 51,-26.5 U2.55
O12: J3.20 U2.56 | length 16.7
  Top Layer w0.2: U2.56 51.25,-26 52.75,-27.5 52.75,-37.51 J3.20
O13: J3.21 U2.57 | length 17.2
  Top Layer w0.2: U2.57 51.5,-25.5 53.25,-27.25 53.25,-38.45 J3.21
O14: J3.22 U2.58 | length 18.9
  Top Layer w0.2: U2.58 51.75,-25 53.75,-27 53.75,-36.41 J3.22
O15: J3.23 U2.62 | length 21.2
  Top Layer w0.2: U2.62 50.5,-23 54.15,-26.65 54.15,-34.27 J3.23
O16: J3.24 U2.63 | length 23.2
  Top Layer w0.2: U2.63 50.75,-22.5 54.55,-26.3 54.55,-32.55 61,-39 J3.24
RS-232_RX: U2.35 U6.9 | length 67.6
  Top Layer w0.2: v1(38.75,-33.75) 38.75,-33.25 39.65,-32.35 U2.35 ; v1(88.25,-22.75) 94.155,-22.75 U6.9
  Bottom Layer w0.2: v1(38.75,-33.75) 39.5,-34.5 43.5,-34.5 48,-30 84.5,-30 88.25,-26.25 v1(88.25,-22.75)
RS-232_TX: U2.36 U6.10 | length 66.9
  Top Layer w0.2: v1(39.75,-33.5) 39.75,-33.25 40.15,-32.85 U2.36 ; v1(87.5,-23.75) 95.5,-23.75 96.075,-23.175 U6.10
  Bottom Layer w0.2: v1(39.75,-33.5) 40,-33.75 43.25,-33.75 47.5,-29.5 84.25,-29.5 87,-26.75 87,-24.25 v1(87.5,-23.75)
RS_485_A: J3.27 R18.2 U7.6 | length 79.2
  Top Layer w0.3: R18.2@11.25,-32.95 11.25,-29.5 14.29,-26.46 U7.6 ; R18.2 11.5,-33.25 10,-34.75 8.75,-34.75 8.25,-35.25 8.25,-37 9.4,-38.15 9.4,-39.9 10.25,-40.75 67.29,-40.75 J3.27
RS_485_B: J3.28 JP1.2 U7.7 | length 88
  Top Layer w0.3: JP1.2 4.3,-35.16 4.3,-39.8 5.75,-41.25 69.33,-41.25 J3.28 ; v1(12.25,-29.75) 14.27,-27.73 U7.7
  Bottom Layer w0.3: JP1.2 9.71,-29.75 v1(12.25,-29.75)
RS_485_RX: U2.23 U7.1 | length 12.8
  Top Layer w0.2: U7.1 24.25,-29 25,-28.25 31,-28.25 31.75,-27.5 U2.23
RS_485_TX: U2.24 U7.4 | length 20.1
  Top Layer w0.2: U7.4 20.31,-25.19 19.75,-25.75 19.75,-29.25 20.25,-29.75 24.25,-29.75 25.25,-28.75 31.25,-28.75 32,-28 U2.24
RS_485_TX_EN: R17.2 U2.33 | length 36.6
  Top Layer w0.2: R17.2 11.846,-36.196 11.846,-39.596 12.5,-40.25 21.5,-40.25 22,-39.75 22,-38.75 23.75,-37 26.25,-37 29.5,-33.75 36.75,-33.75 38.65,-31.85 U2.33
SCL: R14.1 U2.22 U3.6 U4.2 U5.6 | length 57.6
  Top Layer w0.2: U3.6 2.96,-28.46 ; R14.1 7,-27.25 4.17,-27.25 2.96,-28.46 ; U4.2@12.02,-12.77 14,-14.75 15.5,-14.75 18,-17.25 18,-19.25 25.75,-27 U2.22 ; U4.2 12.02,-12.98 10.75,-14.25 9,-14.25 2.96,-20.29 2.96,-23.04 2.29,-23.71 2.29,-27.79 2.96,-28.46
SDA: R13.1 U2.21 U3.5 U4.1 U5.5 | length 69.6
  Top Layer w0.2: U5.5 1.5,-21 0.75,-21.75 0.75,-29.81 U3.5 0.75,-31.69 0.75,-34 1.5,-34.75 3.75,-34.75 4.5,-34 4.5,-33 5.25,-32.25 6,-32.25 7.5,-30.75 R13.1 ; U5.5@1.69,-20.56 9.4,-12.85 U4.1@10.75,-12.85 ; U4.1 10.75,-11.5 11.5,-10.75 15,-10.75 15.75,-11.5 15.75,-14.25 18.5,-17 18.5,-19 26,-26.5 U2.21
SPI0_MISO_MCDA0: SD1.7 U2.46 | length 70.8
  Top Layer w0.2: U2.46 45.15,-33.9 v1(45.75,-34.5)
  Bottom Layer w0.2: v1(45.75,-34.5) 62.5,-34.5 65,-32 85.75,-32 89.735,-28.015 91,-26.75 93.75,-26.75 94.25,-26.25 94.25,-15.575 SD1.7
SPI0_MOSI_MCCDA: R12.1 SD1.2 U2.47 | length 61.7
  Top Layer w0.2: U2.47 45.65,-33.15 v1(46,-33.5) ; v1(93.25,-26) 95.5,-28.25 R12.1
  Bottom Layer w0.2: v1(46,-33.5) 62.5,-33.5 64.5,-31.5 85,-31.5 91,-25.5 92.75,-25.5 v1(93.25,-26)
SPI0_NPCS1_MCDA1: SD1.8 U2.43 | length 84.6
  Top Layer w0.2: v1(43,-35.5) 43,-34.25 43.65,-33.6 U2.43
  Bottom Layer w0.2: v1(43,-35.5) 44.25,-36.75 63.25,-36.75 66.5,-33.5 95.25,-33.5 96.25,-32.5 96.25,-28 94.75,-26.5 94.75,-14.75 93.5,-13.5 93.5,-12.5 92.375,-11.375 SD1.8
SPI0_NPCS2_MCDA2: SD1.9 U2.44 | length 55.4
  Top Layer w0.2: v1(44.15,-35.4) U2.44
  Bottom Layer w0.2: v1(44.15,-35.4) 44.75,-36 63,-36 66,-33 89.25,-33 SD1.9
SPI0_NPCS3_MCDA3: SD1.1 U2.45 | length 54.9
  Top Layer w0.2: U2.45 44.65,-34.65 v1(45.25,-35.25)
  Bottom Layer w0.2: v1(45.25,-35.25) 62.75,-35.25 65.5,-32.5 86.5,-32.5 90.75,-28.25 91,-28 SD1.1
SPI0_SPCK_MCCK: SD1.5 U2.48 | length 58.2
  Top Layer w0.2: U2.48 46.15,-32.15 v1(46.75,-32.75)
  Bottom Layer w0.2: v1(46.75,-32.75) 62.5,-32.75 64.25,-31 84.75,-31 88.069,-27.681 89,-26.75 89,-19.5 90.4,-18.1 SD1.5
TCK: J3.34 R6.1 U2.69 | length 52.3
  Top Layer w0.2: U2.69 52.25,-19.5 56.25,-23.5 56.25,-28.25 63,-35 v1(73.5,-35) ; J3.34 86.82,-35.93 R6.1
  Bottom Layer w0.2: v1(73.5,-35) 82.82,-35 J3.34
TDI: J3.32 R4.1 U2.67 | length 46.8
  Top Layer w0.2: U2.67 51.75,-20.5 55.25,-24 55.25,-28.75 63,-36.5 v1(75.5,-36.5) ; R4.1 81.74,-35.99 J3.32
  Bottom Layer w0.2: v1(75.5,-36.5) 79.24,-36.5 J3.32
TDO: J3.35 R7.1 U2.70 | length 55.1
  Top Layer w0.2: U2.70 52.5,-19 56.75,-23.25 56.75,-28 63,-34.25 v1(72,-34.25) ; J3.35 89.36,-36.14 R7.1
  Bottom Layer w0.2: v1(72,-34.25) 84.61,-34.25 J3.35
TMS: J3.33 R5.1 U2.68 | length 49.5
  Top Layer w0.2: U2.68 52,-20 55.75,-23.75 55.75,-28.5 63,-35.75 v1(74.5,-35.75) ; R5.1 84.25,-39 J3.33
  Bottom Layer w0.2: v1(74.5,-35.75) 81.03,-35.75 J3.33
USB_DET: J2.23 U2.95 | length 28.4
  Top Layer w0.2: U2.95 37.65,-11.1 v1(39,-9.75)
  Bottom Layer w0.2: v1(39,-9.75) 52.13,-9.75 J2.23
USB_PUP: J2.22 U2.96 | length 26.6
  Top Layer w0.2: U2.96 37.15,-10.6 v1(39.25,-8.5)
  Bottom Layer w0.2: v1(39.25,-8.5) 50.84,-8.5 J2.22
VCC1V8: C4.2 C10.2 C13.2 C14.2 C16.2 C21.2 U2.17 U2.40 U2.59 U2.72 U2.99 | length 63.6
  Top Layer w0.3: C4.2 33.45,-13.25 35.25,-13.25 35.65,-13.65 35.65,-15.9 37.5,-17.75 v2(38.5,-17.75) ; U2.17 40,-24.5 42.15,-26.65 U2.40 ; C21.2 34.25,-9.45 34.25,-13.25 ; v1(45.25,-24.5) U2.59 ; v2(46,-18.75) 46.75,-18 52.816,-18 54.616,-19.8 C10.2
  Top Layer w0.5: v2(42.75,-17.75) 45,-17.75 v2(46,-18.75)
  Bottom Layer w0.2: C14.2@36.25,-23.55 C14.2
  Bottom Layer w0.3: v1(36.25,-24.5) C14.2@36.25,-23.55 ; C16.2 v1(42.15,-27.35) 44.15,-27.35 44.95,-26.55 44.95,-24.8 46,-23.75 v2(46,-18.75)
  Bottom Layer w0.5: v2(38.5,-17.75) v2(42.75,-17.75)
VCC3V3: C1.2 C8.2 C9.2 C11.2 C12.2 C15.2 C17.2 C23.2 C24.2 C25.1 C26.1 C27.1 C28.1 C29.1 C31.1 C35.1 C36.1 C37.1 J2.1 J2.2 J2.3 J2.4 L1.2 R3.2 R4.2 R5.2 R6.2 R7.2 R8.2 R9.2 R10.2 R11.2 R12.2 R13.2 R14.2 R15.2 R16.2 SD1.4 U2.15 U2.26 U2.38 U2.61 U2.88 U2.100 U3.8 U4.8 U5.8 U6.16 U7.8 | length 474.8
  Top Layer w0.2: C26.1 C26.1@3.5,-33.25 ; U3.8@5.5,-31.25 U3.8 ; C27.1@7.75,-18.75 C27.1@8.5,-18.75 ; 9.5,-17.5 9.5,-17.25 ; R16.2@12.65,-20.6 R15.2 ; U7.8@15.75,-29.25 U7.8 ; v2(80,-19.5) 80.05,-19.45 v2@80.05,-19.4 ; R4.2 R6.2 R7.2
  Top Layer w0.3: C26.1@3.5,-33.25 U3.8@5.5,-31.25 ; R9.2@14.1,-36.6 15,-37.5 18.35,-37.5 R8.2 ; R9.2 R11.2@14.1,-33.6 ; C28.1 17.5,-30.5 v2(18.25,-29.75) 17.5,-29 15.5,-29 14.1,-30.4 R11.2@14.1,-33.6 ; R10.2 21.893,-34.457 14.957,-34.457 R11.2@14.1,-33.6 ; C15.2 29.1,-30.1 U2.26 35.15,-29.1 v2(36.75,-27.5) ; C11.2 30.5,-24 31,-23.5 34.75,-23.5 37,-21.25 v2(38.5,-21.25) ; 34.75,-15.75 35,-15.75 35.15,-15.6 U2.100 ; v1(39,-27.5) 40,-27.5 41.15,-28.65 U2.38 ; 41.15,-18.65 U2.88 ; v1(45.25,-21.5) 47.25,-23.5 U2.61
  Top Layer w0.4: C23.2@28,-13.75 C23.2 ; C9.2 30.5,-14.25 v3(29.5,-15.25) 30,-15.75 34.75,-15.75 ; 34.5,-15.75 36.462,-17.712 37.75,-19 40.8,-19 41.15,-18.65
  Top Layer w0.5: U3.8 5.5,-29.5 6,-29 8.75,-29 R13.2@9.4,-29.65 ; U5.8 5.5,-20 6.75,-18.75 9,-18.75 9.5,-18.25 9.5,-17.25 10,-16.75 12.25,-16.75 12.65,-17.15 R16.2 15.25,-20.75 17.25,-22.75 v2(19,-22.75) ; v2(8,-25.5) 9.4,-26.9 R13.2 ; C25.1@8.5,-8.49 C25.1 9.75,-8.5 10.75,-7.5 10.75,-3.13 J2.4 ; R3.2 102.15,-33.85 v5(104,-32) ; v2(80,-19.5) 80,-17.8 L1.2 82.3,-17.75 C8.2 ; v2@80,-19.45 v2@80.05,-19.4 ; v3(84.75,-18) 86.25,-16.5 C35.1 ; C29.1 v2(102.75,-10) ; v5(104.25,-28.5) 104,-28.25 R12.2 103.695,-26.205 U6.16 105.545,-20.25 C31.1 C36.1
  Top Layer w1: J2.3 9.83,-1.25 103.5,-1.25 104.75,-2.5 v2(104.75,-5.75) ; C23.2@28,-13.75 v3@29.15,-14.9 ; C35.1 86.8,-15.2 93.05,-15.2 v2(95.25,-13)
  Bottom Layer w0.2: C1.2 41.15,-19.9 41.15,-18.65
  Bottom Layer w0.3: v2(36.75,-27.5) 37.95,-26.3 C17.2 ; C17.2@37.95,-26.45 v1(39,-27.5) ; C1.2 41.45,-20.5 44.25,-20.5 v1(45.25,-21.5) 44.95,-21.8 C12.2
  Bottom Layer w0.5: v2@7.75,-25.5 v2(8,-25.5) ; v2(19,-22.75) 26.5,-15.25 v3(29.5,-15.25) ; v2(36.75,-27.5) 35.5,-27.5 34.5,-26.5 34.5,-23 36.25,-21.25 v2(38.5,-21.25) 39.7,-20.05 C1.2 ; v2(80,-19.5) 83.25,-19.5 86,-16.75 92.75,-16.75 93.45,-17.45 93.45,-19.8 92.65,-20.6 SD1.4 ; v2(95.25,-13) 99.5,-17.25 99.5,-26.75 101.25,-28.5 v5(104.25,-28.5) 104.25,-31.75 v5(104,-32)
  Bottom Layer w1: v2(8,-25.5) 7.85,-25.5 1,-18.65 1,-5 J2.1 J2.2 J2.3 J2.4 13.12,-5.5 19.75,-5.5 v3(29.5,-15.25) 29.5,-24 23.75,-29.75 v2(18.25,-29.75) ; v2(95.25,-13) 98.25,-10 v2(102.75,-10) 104.75,-8 v2(104.75,-5.75)
  other v2: 39.25,-19 104.75,-7.25
pads on no net: SD1.0 SD1.10 SD1.11 U4.3
copper on no net: | length 35.5
  Bottom Layer w0.254: 9.283,-24.003 cw(c20.533,-25.001) 10.28,-20.264 ; 10.914,-30.802 ccw(c20.5,-25) 12.939,-33.27 ; 16.158,-14.783 cw(c20.5,-25) 23.55,-14.325 ; 16.75,-14.5 16.75,-13.5 ; 16.75,-12 16.75,-11.5 22.25,-11.5 ; 17.532,-35.883 ccw(c20.5,-25) 28.477,-32.977 ; 20,-10.75 21,-10.75 ; 20.5,-11.25 20.5,-10.25

## Polygon pours and split planes (outlines as drawn)
GND on Top Layer (hatched 90Degree grid 0 track 0.2, remove dead copper): 0.5,-0.5 109.5,-0.5 109.5,-41.5 0.5,-41.5
VCC3V3 on Top Layer (hatched 90Degree grid 0 track 0.3, remove dead copper): 12,-4 7,-4 7,-0.5 107,-0.5 107,-7.75 103.25,-7.75 103.25,-1.5 11.75,-1.5 11.75,-4
GND on Bottom Layer (hatched 90Degree grid 0 track 0.2, remove dead copper): 0.5,-0.5 109.5,-0.5 109.5,-41.5 0.5,-41.5
VCC3V3 on Bottom Layer (hatched 90Degree grid 0 track 0.3, remove dead copper): 23,-21.25 27.75,-21.25 27.75,-28 34.25,-28 34.25,-22.5 37.55,-19.2 37.55,-13.75 30.5,-13.75 30.5,-13.8
VCC3V3 on Bottom Layer (hatched 90Degree grid 0 track 0.3, remove dead copper): 105.25,-5 105.25,-34.25 98,-34.25 98,-16.274 95.25,-13.524 97.75,-11.024 97.75,-5
VCC3V3 on Bottom Layer (hatched 90Degree grid 0 track 0.3, remove dead copper): 11.75,-1.5 1,-1.5 1,-20 7.25,-26.25 8.75,-26.25 8.75,-25 7.75,-25 1.5,-18.75 1.25,-18.75 1.25,-5 11.25,-5 13,-6.75 18.75,-6.75 24.5,-12.5 24.5,-15.5 19,-21 19,-22.75 22.5,-22.75 25.75,-19.5 31.25,-19.5 31.25,-13.75 28.5,-13.75 20,-5.25 13.5,-5.25 12.25,-4 12,-3.75 11.75,-3.5
GND on Bottom Layer (hatched 90Degree grid 0 track 0.3, remove dead copper): 39.5,-22.5 40.25,-21.75 43.25,-21.75 43.25,-22.5 43.75,-22.5 43.75,-26.75 42.5,-26.75 42,-25.75 42,-25 40,-25 39.5,-25.25 37,-25.25 37,-26.5 35.75,-26.5 35.75,-25.25 36.5,-25.25 37.25,-24.5 37.25,-22.5
VCC3V3 on Bottom Layer (hatched 90Degree grid 0 track 0.3, remove dead copper): 37.95,-26 39.5,-26 39.5,-28 34.25,-28 34.25,-22.5 38.1,-18.65 41.75,-18.65 41.75,-20.5 45.25,-20.5 45.25,-22.75 44.25,-22.75 44.25,-21 39.5,-21 38.5,-22 36.25,-22 35.25,-23 35.25,-26.75 35.75,-27.25 36.75,-27.25 37.5,-26.5 37.95,-26.05
VCC1V8 on Bottom Layer (hatched 90Degree grid 0 track 0.3, remove dead copper): 46,-18.75 49.25,-18.75 49.25,-28 40.5,-28 40.5,-25.95 41.9,-27.35 44.25,-27.35 44.95,-26.65 44.95,-24.8 45.25,-24.5 46,-23.75

## Keep-outs
Keep-Out Layer:
  the board outline again, w0.3

## Other copper
Bottom Layer:
  text "BAT1" at 19.25,-10.25 h1
  text "SD1" at 93.25,-35.5 h1 r180

## Silkscreen, mask and mechanical layers (free items; w line width, h text height)
Top Overlay:
  lines w0.254: 6.5,-37.27 6.75,-37.52 ; 6.75,-40.25 6.75,-37.52 ; 6.75,-37.52 6.27,-38 7.25,-38 6.77,-37.52 6.75,-37.52
  text "Large Brick Open Source PLC - April 2013" at 42,-6.25 h1
  text "StartingElectronics.com" at 42.25,-7.75 h1
  text "OSPLC 2.2 CPU Board" at 42.25,-9.5 h1
  text "RS-232" at 68,-31 h1.2
Drill Drawing:
  text ".LEGEND" at 115.08,-36.92 h1.52
  text "Drill Drawing." at 115.08,-39.46 h1.52

## Dimensions
0,-42 to 110,-42 on Mechanical 1
0,-42 to 0,0 on Mechanical 1

## Text inside footprints (layer, text, board x,y; h text height)
BAT1: Bottom Overlay "-" at 19.9,-37.75 h1.2 r270; Bottom Overlay "+" at 19.9,-11.15 h1.2 r270